# Altium PCB ModuleESP32Devkit1_CH340.PcbDoc
Units mil, origin at the board's own origin, x right, y up, seen from the top; angles counter-clockwise.
Board outline 1122.44 x 2039.37 mil, 2 copper layers (Top Layer, Bottom Layer); 31 components, 42 nets, 189 pads, 42 vias.
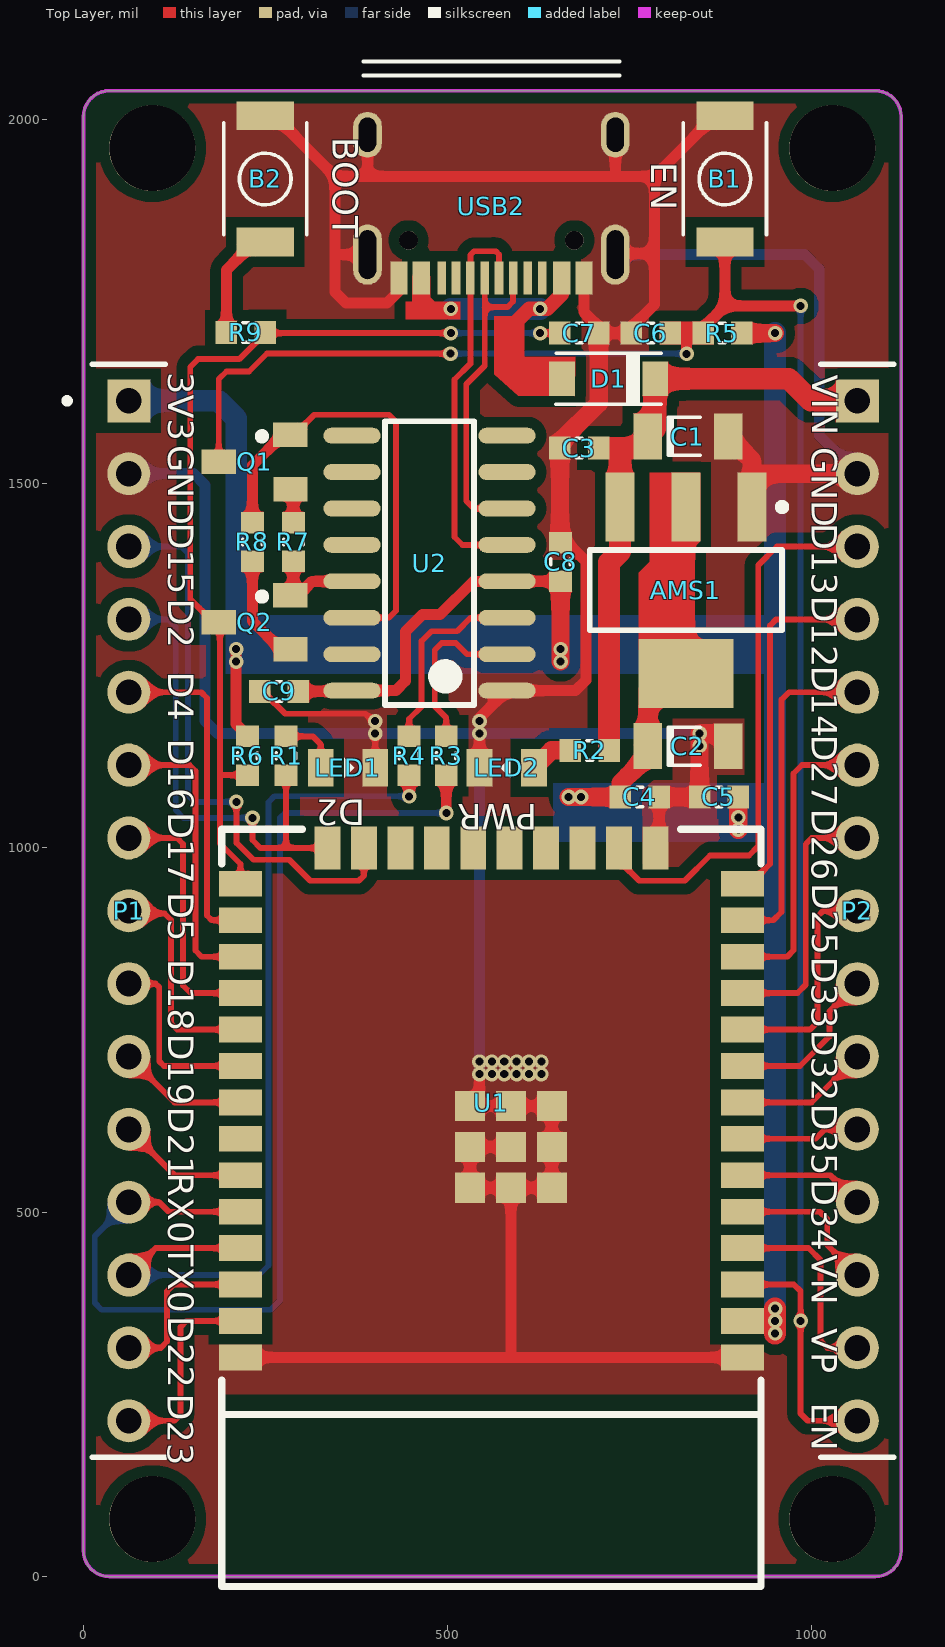
[diagram p0: Top Layer view]
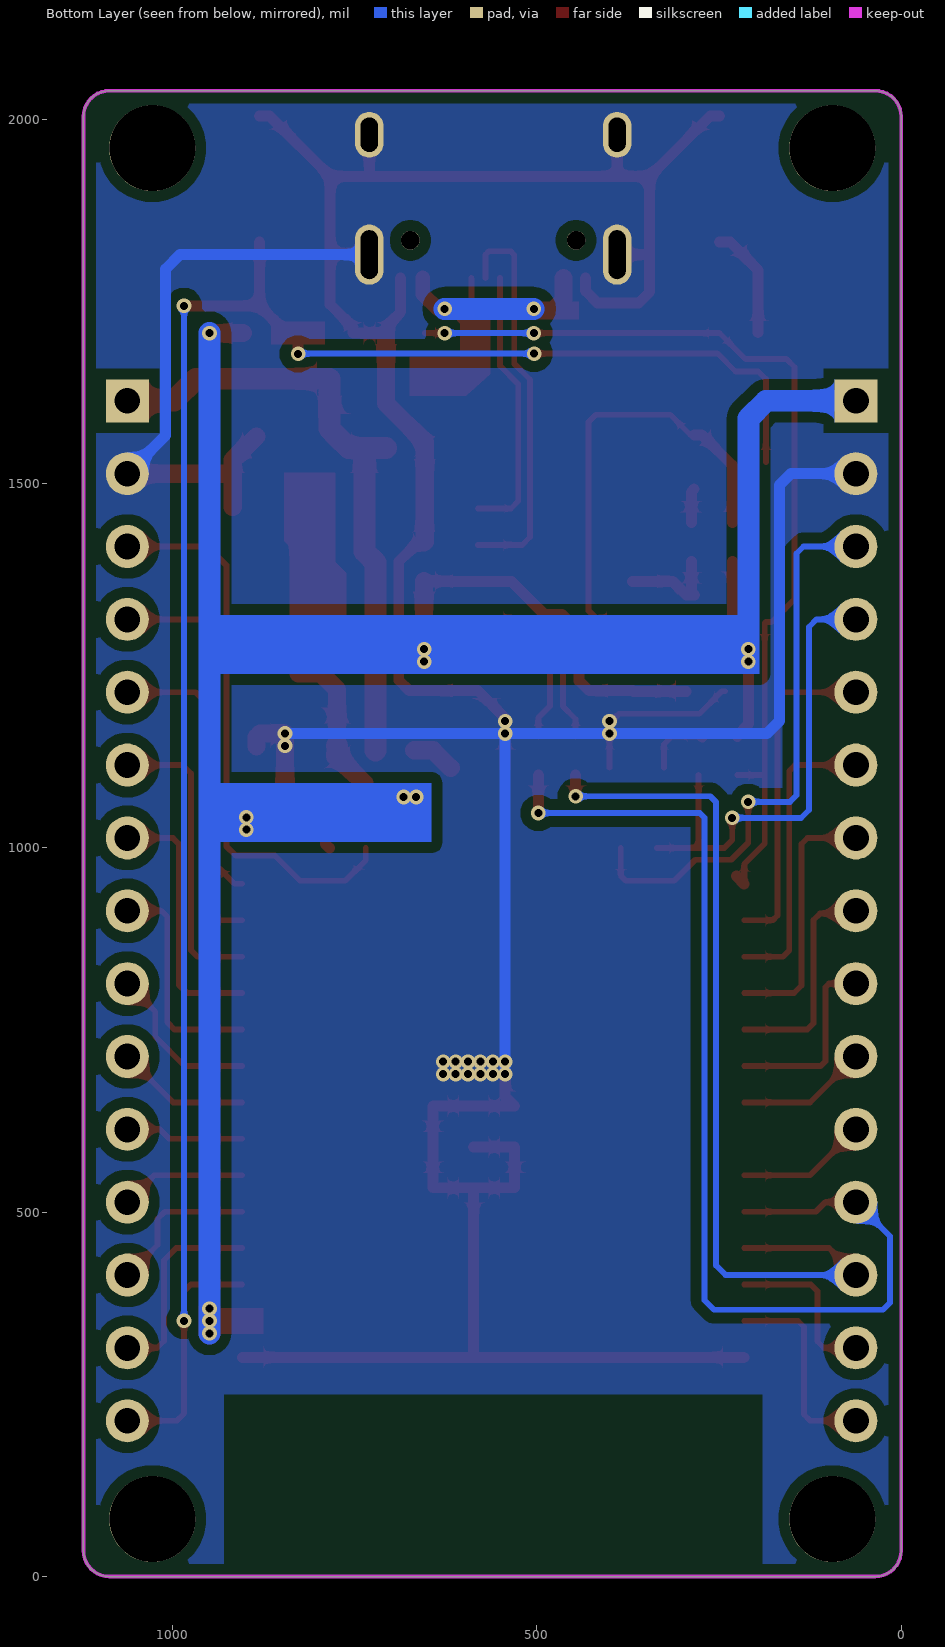
[diagram p1: Bottom Layer view, seen from below]
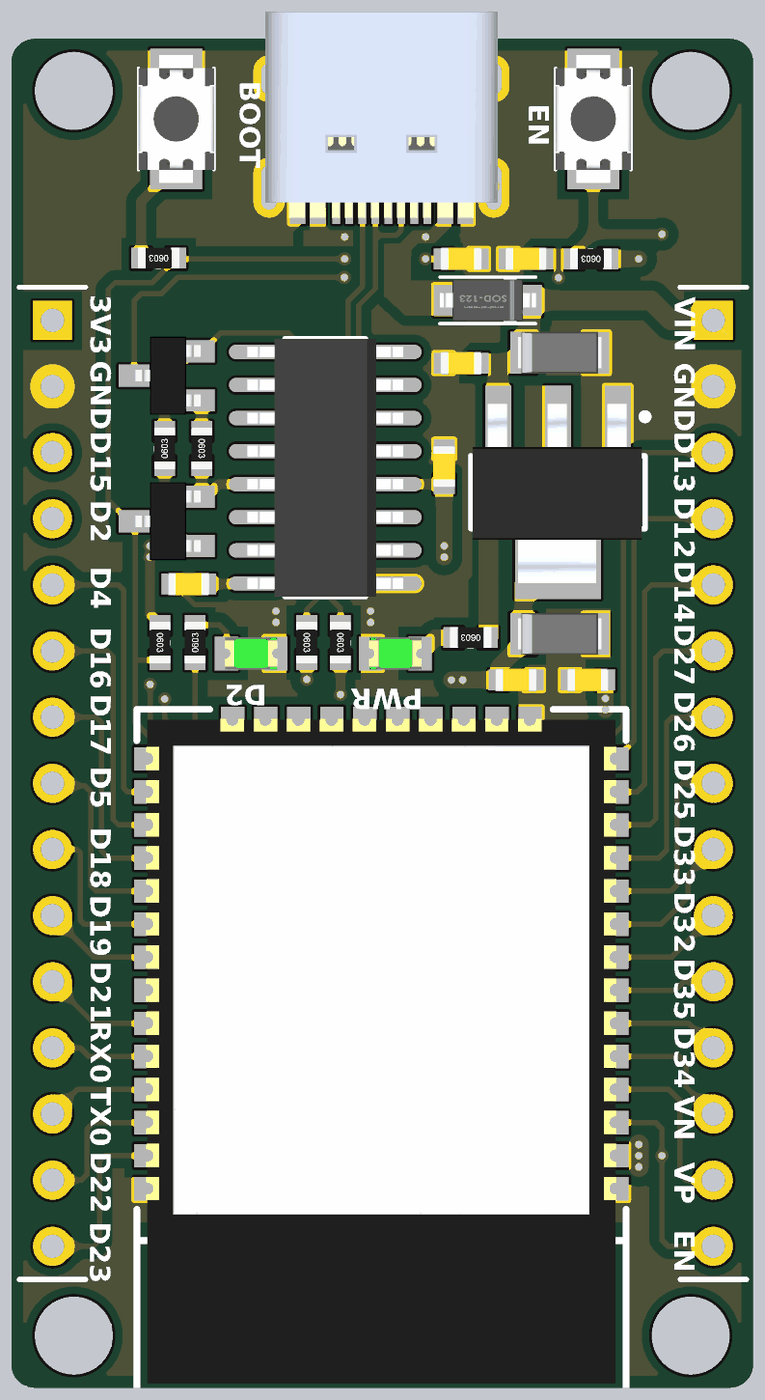
[diagram p2: 3D render of the assembled board from above, using the file's embedded part models]

## Layer stack, top to bottom
Top Solder: solder mask 0.4, Solder Resist, Dk 3.5
Top Layer: signal copper 1.4
Dielectric 1: dielectric 12.6, FR-4, Dk 4.8
Bottom Layer: signal copper 1.4
Bottom Solder: solder mask 0.4, Solder Resist, Dk 3.5

## Board outline
0,35.43 0,2003.94 cw(c35.43,2003.94) 35.43,2039.37 1087.01,2039.37 cw(c1087.01,2003.94) 1122.44,2003.94 1122.44,35.43 cw(c1087.01,35.43) 1087.01,0 35.43,0 cw(c35.43,35.43)

## Design rules (kind name [scope] priority, off if disabled: settings)
Clearance Clearance_Polygon [InPolygon] p1: gap=15 ignorepadtopadclearanceinfootprint=FALSE
Clearance [All] p2: gap=8 ignorepadtopadclearanceinfootprint=FALSE except(0: Arc-SMDPad Arc-Hole Track-SMDPad Track-Hole SMDPad-SMDPad SMDPad-Hole THPad-Text THPad-Hole Via-Hole Fill-Hole Poly-Hole Region-Hole Text-Hole)
HoleSize [All] p1: absolutevalues=TRUE maxlimit=200 minlimit=1 maxpercent=80.000 minpercent=20.000
HoleToHoleClearance [All] p1: gap=2 allowstackedmicrovias=TRUE
MinimumSolderMaskSliver [All] p1: minsoldermaskwidth=2
PlaneConnect [All] p1: planeconnectstyle=Direct reliefexpansion=20 reliefentries=4 reliefconductorwidth=10 reliefairgap=10
PolygonConnect [All] p1: connectstyle=Direct reliefconductorwidth=10 reliefentries=4 polygonreliefangle="90 Angle" airgapwidth=10
RoutingVias [All] p1: holewidth=28 width=50 viastyle="Through Hole" minholewidth=28 minwidth=50 maxholewidth=28 maxwidth=50
SilkToSilkClearance [All] p1: silktosilkclearance=2
SilkToSolderMaskClearance [IsText] p1: minsilkscreentomaskgap=2 clearancetoexposedcopper=TRUE
SolderMaskExpansion [All] p1: expansion=4 istentingtop=FALSE
Width Width_Power [InNetClass('POWER')] p1: maxlimit=30 minlimit=8 preferedwidth=15
Width [All] p2: maxlimit=25 minlimit=8 preferedwidth=15
24 further rules are at their usual default settings.

## Classes and differential pairs
net class POWER: 3.3V GND V_USB VIN

## Components (designator, comment, footprint, x,y, rotation, side; value= is the part's Value field where it differs from the comment)
AMS1 "AMS1117" SOT223-4N 827,1353.8 r270 top
B1 "Button" "BUTTON 2P 3X4X2MM" 880.54,1918.25 r90 top
B2 "Button" "BUTTON 2P 3X4X2MM" 249.47,1918.25 r90 top
C1 "4.7uF" "C_Tanta_3216 - Black" 767.05,1596.73 r270 top value=10uF/50V
C2 "10uF" "C_Tanta_3216 - Black" 767.05,1171.63 r270 top value=10uF/50V
C3 "104" CN-SMD-0603 680.59,1548.98 r0 top value=103
C4 "104" CN-SMD-0603 763.67,1070 r180 top value=103
C5 "104" CN-SMD-0603 872.33,1070 r0 top value=103
C6 "104" CN-SMD-0603 778.79,1706.7 r0 top value=103
C7 "NC" CN-SMD-0603 680.59,1706.7 r180 top value=103
C8 "104" CN-SMD-0603 655,1392.67 r270 top value=103
C9 "104" CN-SMD-0603 268.43,1215 r0 top value=103
D1 "S4" DIO-SMD-123 720.91,1644 r180 top value=1N5007
LED1 "LED SMD" LED-0805-Green 363,1110 r0 top
LED2 "LED SMD" LED-0805-Green 581,1110.01 r180 top
P1 "Header 15H" "Jump 1x15 - 2.54" 62.2,913.78 r270 top
P2 "Header 15H" "Jump 1x15 - 2.54" 1062.2,913.78 r270 top
Q1 "S8050" SOT23B 235,1530 r90 top
Q2 "S8050" SOT23B 235,1310 r90 top
R1 "1k" RES-SMD-0603 278.09,1126.59 r90 top value="R1/4W - 1K"
R2 "1k" RES-SMD-0603 695,1134 r180 top value="R1/4W - 1K"
R3 "470R" RES-SMD-0603 498,1126.59 r270 top value="R1/4W - 1K"
R4 "470R" RES-SMD-0603 447,1126.59 r270 top value="R1/4W - 1K"
R5 "4.7K" RES-SMD-0603 877,1706.7 r180 top value="R1/4W - 1K"
R6 "12K" RES-SMD-0603 225,1126.59 r270 top value="R1/4W - 1K"
R7 "10K" RES-SMD-0603 288.09,1420 r270 top value="R1/4W - 1K"
R8 "10K" RES-SMD-0603 231.81,1420 r90 top value="R1/4W - 1K"
R9 "470" RES-SMD-0603 222.89,1707.7 r180 top value="R1/4W - 1K"
U1 "ESP" "ESP32 WROOM" 914.33,1009.84 r180 top
U2 "CH340C" SO16 475,1391 r180 top
USB2 "USB type C" "USB 16P type C" 560,1733.13 r180 top

## Footprints (in the part's own frame and the unit in brackets; to place one, negate y for a bottom-side part, rotate by r counter-clockwise, add the part's x,y. Pads: shape width x height; smd on the part's side, far side on the other; paste and mask are expansions set on the pad)
"BUTTON 2P 3X4X2MM" [mm]
  rect 1x2 smd: 1(-2.2,0) 2(2.2,0)
  silkscreen extent -1.95,-1.45 1.95,1.45, body extent -2.45,-1.45 2.45,1.45, height 2
"C_Tanta_3216 - Black" [mm]
  rect 1.6x1 smd: 1(0.81,0.185) 2(0.813,2.997)
  Top Layer lines w0.127: 0.81,2.995 cw(c0.813,2.995) 0.813,2.997
  Top Layer lines w0.762: 0.81,0.185 ccw(c0.81,0.188) 0.813,0.188
  silkscreen extent 0.14,0.91 1.47,2.03, body extent 0.01,-0.01 1.61,3.19, height 1.6
CN-SMD-0603 [mm]
  round 0.254 on Mech15: 0(0,0)
  rect 0.75x0.8 smd: 1(-0.675,0) 2(0.675,0)
  silkscreen extent -0.1,-0.34 0.1,0.34, body extent -0.8,-0.43 0.8,0.43, height 0.8
DIO-SMD-123 [mm]
  rect 0.9x1.2 smd: 1(1.624,0) 2(-1.624,0)
  silkscreen extent -1.84,-0.89 1.85,0.89, body extent -1.85,-0.8 1.85,0.8, height 1.25
"ESP32 WROOM" [mm]
  rect 1.5x0.9 smd: 1(0.25,18.01) 2(0.25,16.74) 3(0.25,15.47) 4(0.25,14.2) 5(0.25,12.93) 6(0.25,11.66) 7(0.25,10.39) 8(0.25,9.12) 9(0.25,7.85) 10(0.25,6.58) 11(0.25,5.31) 12(0.25,4.04) 13(0.25,2.77) 14(0.25,1.5) 25(17.75,1.5) 26(17.75,2.77) 27(17.75,4.04) 28(17.75,5.31) 29(17.75,6.58) 30(17.75,7.85) 31(17.75,9.12) 32(17.75,10.39) 33(17.75,11.66) 34(17.75,12.93) 35(17.75,14.2) 36(17.75,15.47) 37(17.75,16.74) 38(17.75,18.01)
  rect 0.9x1.5 smd: 15(3.285,0.25) 16(4.555,0.25) 17(5.825,0.25) 18(7.095,0.25) 19(8.365,0.25) 20(9.635,0.25) 21(10.905,0.25) 22(12.175,0.25) 23(13.445,0.25) 24(14.715,0.25)
  rect 1.05x1.05 smd: 39(6.895,9.245) 39(6.895,10.67) 39(6.895,12.095) 39(8.32,9.245) 39(8.32,10.67) 39(8.32,12.095) 39(9.745,9.245) 39(9.745,10.67) 39(9.745,12.095)
  silkscreen extent -0.4,-0.4 18.4,26, body extent -0.03,-0.04 18.04,25.5, height 3
"Jump 1x15 - 2.54" [mm] "Connector; Header; 15 Position"
  rect 1.5x1.5 hole 0.9: 1(-17.78,0)
  round 1.5 hole 0.9: 2(-15.24,0) 3(-12.7,0) 4(-10.16,0) 5(-7.62,0) 6(-5.08,0) 7(-2.54,0) 8(0,0) 9(2.54,0) 10(5.08,0) 11(7.62,0) 12(10.16,0) 13(12.7,0) 14(15.24,0) 15(17.78,0)
  silkscreen extent -19.05,-1.27 19.05,1.27
LED-0805-Green [mm]
  round 0.254 on Mech15: 0(0,0)
  rect 0.9x1.3 smd: 1(-0.95,0) 2(0.95,0)
  silkscreen extent -0.13,-0.35 0.22,0.35, body extent -1.01,-0.63 1.01,0.62, height 1.1
RES-SMD-0603 [mm]
  round 0.254 on Mech15: 0(0,0)
  rect 0.75x0.8 smd: 1(-0.675,0) 2(0.675,0)
  silkscreen extent -0.1,-0.34 0.1,0.34, body extent -0.8,-0.4 0.8,0.4, height 0.43
SO16 [mm] "SOIC, 16-Leads, Body 9.90x3.91mm, Pitch 1.27mm, IPC Medium Density"
  oval 2x0.55 smd: 1(-2.7,4.445) 2(-2.7,3.175) 3(-2.7,1.905) 4(-2.7,0.635) 5(-2.7,-0.635) 6(-2.7,-1.905) 7(-2.7,-3.175) 8(-2.7,-4.445) 9(2.7,-4.445) 10(2.7,-3.175) 11(2.7,-1.905) 12(2.7,-0.635) 13(2.7,0.635) 14(2.7,1.905) 15(2.7,3.175) 16(2.7,4.445)
  silkscreen extent -1.55,-4.95 1.55,4.95, body extent -3,-4.95 3,4.95, height 1.4
SOT23B [mm] "SOT 23B"
  rect 0.85x1.2 smd: 1(0.94,-1.245) 2(0,1.25) 3(-0.95,-1.25)
  silkscreen extent 0.77,-0.38 1.02,-0.13, body extent -1.5,-1.3 1.5,1.2, height 1.06
SOT223-4N [mm] "SOT223, 4-Leads, Body 6.5x3.5mm, Pitch 2.3mm, Lead Span 7mm, IPC Medium Density"
  rect 2.4x1 smd: 1(-2.9,2.3) 2(-2.9,0) 3(-2.9,-2.3)
  rect 2.4x3.3 smd: 4(2.9,0)
  silkscreen extent -3.02,-3.35 1.4,3.48, body extent -3.39,-3.27 3.5,3.23, height 1.72
"USB 16P type C" [mm]
  oval 1x2.1 hole 0.6 slot 1.7 at 90 deg mask+0.102: 0(-4.32,-2.065) 0(4.32,-2.065)
  oval 1x1.6 hole 0.6 slot 1.2 at 90 deg mask+0.102: 0(-4.32,-6.245) 0(4.32,-6.245)
  round 0.65 hole 0.65 unplated mask+0.102: 0(-2.89,-2.565) 0(2.89,-2.565)
  rect 0.6x1.15 smd mask+0.1: A1/B12(-3.225,-1.25) A4/B9(-2.45,-1.25) B1/A12(3.225,-1.25) B4/A9(2.45,-1.25)
  rect 0.3x1.15 smd mask+0.1: A5(-1.265,-1.25) A6(-0.265,-1.25) A7(0.235,-1.25) A8(1.235,-1.25) B5(1.735,-1.25) B6(0.735,-1.25) B7(-0.765,-1.25) B8(-1.765,-1.25)
  silkscreen extent -4.47,-8.8 4.47,-8.31, body extent -4.47,-8.8 4.47,-0.9, height 0.59

## Part data
AMS1: "AMS"
B1 B2: library part "Button 2 Pin", "Button 2 pin"
C1 C2: library part CP-MKB, Description 1="10 => 220uF/6,3V/10V - 10uF => 100uF/16V", Description 2="0,1uF => 33uF/50V - 10uF => 22uF/63V", Description 3="0,47uF => 10uF/100V"
C3 C4 C5 C6 C7 C8 C9: library part CAP-MKB, "Cap SMD"
D1: library part Diode, "Default Diode", Code - JEDEC=DO-214-AB, Published=8-Jun-2000, Publisher="Altium Limited", Revision="July-2002: Re-released for DXP Platform."
LED1 LED2: library part "LED - MKB"
P1 P2: "Header, 15-Pin, Right Angle", LatestRevisionDate=17-Jul-2002, LatestRevisionNote="Re-released for DXP Platform.", Publisher="Altium Limited"
Q1: library part "Trans NPN_2", "Transistor dán"
Q2: library part "Trans NPN_1", "Transistor dán"
R1 R2 R3 R4 R5 R6 R7 R8 R9: library part "RES - MKB", "Resistor 1/4W"
U1: library part "ESP 32 WROOM", "ESP32"
U2: "High and Low Side Driver", ComponentLink1Description="Manufacturer Link", ComponentLink1URL=http://www.irf.com/, ComponentLink2Description=Datasheet, ComponentLink2URL=http://www.irf.com/product-info/datasheets/data/ir2110.pdf, DatasheetVersion=PD60147J, LatestRevisionDate=04-Mar-2005, LatestRevisionNote="Stylized 3D Model Added.", Note="Pins 4, 8 and 14 are not connected", PackageDescription="DIP; 14 Leads; Row Spacing 7.62 mm; Pitch 2.54 mm", PackageReference=PDIP14, Published=8-Jun-2000, Publisher="Altium Limited"
USB2: library part "USB C 16P", "Type C"

## Free pads (board coordinates)
  round 118.11 hole 118.11 unplated: ""(94.49,78.74) ""(94.49,1960.63) ""(1027.95,78.74) ""(1027.95,1960.63)

## Via types
v1: diameter 20, hole 11, Top Layer to Bottom Layer, tented both sides, 42 vias

## Nets (pads, with @x,y where several pads share a name; then routed paths per layer and width w, separated by ;. In a path a pad name is that pad's centre, name@x,y a point inside that pad or via, vN(x,y) a via of type N, cw(c..) or ccw(c..) an arc to the next point about the centre after c; other vN are vias at no path point)
3.3V: AMS1.2 AMS1.4 C2.1 C4.2 C5.2 C8.2 C9.2 P1.1 R5.1 R6.1 U1.2 U2.4 U2.16 | length 4342.2
  Top Layer w15: v1(209.65,1272.83) v1(209.65,1255.83) 209.65,1170.15 225,1154.8 R6.1 ; C9.2 367.7,1215 U2.16 428.78,1216 442.25,1229.46 442.25,1297.16 465.64,1320.55 489.55,1320.55 535,1366 U2.4 654.9,1366 C8.2 ; C2.1@774.35,1129.28 C2.1@774.35,1139.63
  Top Layer w25: v1(654.9,1255.83) v1(654.9,1272.83) C8.2@654.9,1366 ; v1(665.9,1070) v1(682.9,1070) C4.2 737.09,1088.85 C2.1@774.35,1126.11 ; C2.1 774.35,1217.35 796.63,1239.63 AMS1.4 AMS1.2 ; v1(898.91,1025.09) v1(898.91,1042.09) C5.2 ; R5.1 v1(949.39,1706.7) ; U1.2 v1(949.39,350.79)
  Top Layer w30: C2.1@774.35,1126.11 C2.1@774.35,1129.28 ; C2.1@774.35,1139.63 C2.1 ; v1(949.39,333.79) v1(949.39,350.79) v1(949.39,367.79)
  Bottom Layer w30: P1.1 185.34,1613.78 209.65,1589.47 v1(209.65,1272.83) v1(209.65,1255.83) v1(654.9,1255.83) v1(654.9,1272.83) ; v1@656.07,1257 948.56,1257 949.39,1256.17 ; v1(665.9,1070) v1(682.9,1070) 943.81,1070 ; v1(898.91,1025.09) 945.74,1025.09 949.39,1028.74 ; v1(949.39,333.79) v1(949.39,350.79) v1(949.39,367.79) 949.39,1028.74 ; v1(949.39,1706.7) 949.39,1256.17 ; 949.39,1028.74 949.39,1256.17
D0: C7.2 Q2.2 R6.2 R9.1 U1.25 | length 1321.9
  Top Layer w8: U1.25 215.51,978.06 187.29,1006.29 187.29,1100 ; R6.2 187.3,1100.02 ; v1(504.3,1706.7) 249.46,1706.7 213.73,1670.97 157.24,1670.97 146.57,1660.3 146.57,1341.42 177.99,1310 Q2.2 187.29,1308.5 187.29,1100 ; v1(626.8,1706.7) C7.2
  Top Layer w15: U1.25 U1.25@226,961.28
  Bottom Layer w8: v1(504.3,1706.7) v1(626.8,1706.7)
D2: P1.4 R1.1 U1.24 | length 667.9
  Top Layer w8: v1(232,1041.26) 232,1010.81 242.81,1000 278.09,1000 ; R1.1 278.09,1000 ; U1.24 278.09,1000
  Bottom Layer w8: P1.4 116.27,1313.78 126.69,1303.37 126.69,1051.96 137.39,1041.26 v1(232,1041.26)
D4: P1.5 U1.26 | length 457.8
  Top Layer w8: P1.5 161.79,1213.78 169.74,1205.82 169.74,907.26 176.21,900.79 U1.26
D5: P1.8 U1.29 | length 303.8
  Top Layer w8: P1.8 65.98,910 111.24,910 120.26,900.98 120.26,759.37 128.84,750.79 U1.29
D12: P2.4 U1.14 | length 499.8
  Top Layer w8: U1.14 915.15,950.79 942.27,977.91 942.27,1305.19 950.86,1313.78 P2.4
D13: P2.3 U1.16 | length 771.9
  Top Layer w8: U1.16 735,982.95 763.01,954.94 825.32,954.94 859.92,989.54 913.54,989.54 926.27,1002.27 926.27,1388.07 951.98,1413.78 P2.3
D14: P2.5 U1.13 | length 458.1
  Top Layer w8: U1.13 947,900.79 958.27,912.06 958.27,1203.6 968.45,1213.78 P2.5
D15: P1.3 U1.23 | length 779.1
  Top Layer w8: v1(210,1063.26) 210,1006.99 233.27,983.73 282.55,983.73 311.34,954.93 377.93,954.93 385,962 U1.23
  Bottom Layer w8: P1.3 134,1413.78 143.66,1404.12 143.66,1072.32 152.72,1063.26 v1@208,1063.26
D16: P1.6 U1.27 | length 406.6
  Top Layer w8: P1.6 145.54,1113.78 153.74,1105.58 153.74,859.16 162.12,850.79 U1.27
D17: P1.7 U1.28 | length 355.4
  Top Layer w8: P1.7 128.57,1013.78 136.74,1005.61 136.74,811.26 147.21,800.79 U1.28
D18: P1.9 U1.30 | length 259.5
  Top Layer w8: P1.9 99.02,813.78 104,808.8 104,707.33 110.55,700.79 U1.30
D19: P1.10 U1.31 | length 179.4
  Top Layer w8: P1.10 125.2,650.79 U1.31
D21: P1.11 U1.33 | length 179.4
  Top Layer w8: P1.11 125.2,550.79 U1.33
D22: P1.14 U1.36 | length 229.7
  Top Layer w8: P1.14 106.08,313.78 114.84,322.54 114.84,391.47 124.16,400.79 U1.36
D23: P1.15 U1.37 | length 280.5
  Top Layer w8: P1.15 124.78,213.78 133.4,222.4 133.4,342.6 141.59,350.79 U1.37
D25: P2.8 U1.10 | length 310.4
  Top Layer w8: U1.10 997.65,750.79 1007.5,760.64 1007.5,905.96 1015.32,913.78 P2.8
D26: P2.7 U1.11 | length 359.2
  Top Layer w8: U1.11 980,800.79 991.47,812.26 991.47,1005.55 999.7,1013.78 P2.7
D27: P2.6 U1.12 | length 408.8
  Top Layer w8: U1.12 966,850.79 974.76,859.55 974.76,1102.19 986.35,1113.78 P2.6
D32: P2.10 U1.8 | length 183.8
  Top Layer w8: U1.8 999.21,650.79 P2.10
D33: P2.9 U1.9 | length 224.7
  Top Layer w8: U1.9 951.58,700.79 983.59,700.79 1023.87,741.07 1023.87,775.45 P2.9
D34: P2.12 U1.6 | length 173
  Top Layer w8: U1.6 1025.2,550.79 P2.12
D35: P2.11 U1.7 | length 163.1
  Top Layer w8: U1.7 1004.79,600.79 1017.78,613.78 P2.11
D+: U2.5 USB2.A6 USB2.B6 | length 548.1
  Top Layer w8: USB2.A6 570.43,1814.57 566,1819 536,1819 531.06,1814.06 USB2.B6 531.06,1664.69 509.36,1642.98 509.36,1426.8 520.16,1416 U2.5
D-: U2.6 USB2.A7 USB2.B7 | length 451.2
  Top Layer w8: USB2.A7 550.75,1742.35 ; U2.6 535.7,1466 525.55,1476.15 525.55,1636.55 550.75,1661.75 550.75,1742.35 ; USB2.B7 589.64,1781.86 589.64,1750 581.98,1742.35 550.75,1742.35
DTR: Q2.1 R7.2 U2.13 | length 140.7
  Top Layer w15: R7.2 288.09,1351.09 Q2.1 294.76,1347 313.76,1366 U2.13
EN: B1.1 C6.2 P2.15 Q1.2 R5.2 U1.3 | length 2812
  Top Layer w8: Q1.2 185.79,1643.57 196.2,1653.98 227.33,1653.98 251.94,1678.59 v1(503.85,1678.59) ; U1.3 975,400.79 984.41,391.38 v1(984.41,350.79) 984.41,223.59 994.21,213.78 P2.15
  Top Layer w15: C6.2 829.61,1706.7 ; v1(827.9,1678.14) 827.9,1704.98 829.61,1706.7 ; B1.1 880.54,1743.99 ; v1(984.41,1743.99) 880.54,1743.99 ; 829.61,1706.7 R5.2 850.42,1713.88 880.54,1743.99
  Bottom Layer w8: v1(503.85,1678.59) v1@827.44,1678.59 ; v1(984.41,350.79) v1(984.41,1743.99)
GND: AMS1.1 B1.2 B2.2 C1.2 C2.2 C3.1 C4.1 C5.1 C6.1 C7.1 C8.1 C9.1 LED1.2 LED2.2 P1.2 P2.2 U1.1 U1.15 U1.38 U1.39 U2.1 USB2.0@389.92,1814.43 USB2.0@389.92,1978.99 USB2.0@730.08,1814.43 USB2.0@730.08,1978.99 USB2.A1/B12 USB2.B1/A12 | length 6604.5
  Top Layer w8: C9.1 246.14,1215 276.97,1184.16 387.18,1184.16 v1@400.4,1170.94 ; LED1.2 v1(400.4,1157.09)
  Top Layer w15: U1.38 586,300.79 ; B2.2 262.13,2004.87 345.21,1921.79 ; USB2.0@389.92,1814.43 349.39,1814.43 345.21,1810.24 ; USB2.0@390,1954.38 390,1938.08 389.92,1938 389.92,1921.79 ; USB2.B1/A12 433.03,1764.32 416.83,1748.13 360.2,1748.13 345.21,1763.12 345.21,1810.24 ; v1(543.6,689.67) 543.6,658.79 530.67,645.87 586.77,645.87 642.87,645.87 642.87,589.76 642.87,533.66 U1.39@586.77,533.66 ; LED2.2 v1(543.6,1157.09) ; v1@543.6,1178.3 U2.1 675.52,1216 689.7,1230.18 689.7,1393.3 663.75,1419.25 C8.1 ; U1.39@586.77,589.76 530.67,589.76 530.67,533.66 U1.39@586.77,533.66 ; USB2.A1/B12 686.97,1735.43 707.16,1715.23 C7.1 C6.1 752.22,1714.62 783.73,1746.13 783.73,1816 ; USB2.0@730.08,1814.43 731.65,1816 783.73,1816 ; USB2.0@730.08,1978.99 730.08,1921.87 730,1921.79 ; U1.15 790.24,1005.24 C4.1 ; B1.2 866.81,2004.87 783.73,1921.79 ; U1.1 586,300.79 ; 345.21,1810.24 345.21,1921.79 ; 345.21,1921.79 389.92,1921.79 ; 389.92,1921.79 730,1921.79 ; 586,300.79 586.77,301.56 U1.39@586.77,533.66 ; 730,1921.79 783.73,1921.79 ; 783.73,1816 783.73,1921.79
  Top Layer w25: C8.1 654.02,1420.23 C3.1 654.02,1557.02 707.16,1610.16 C7.1 ; C4.1 C5.1 v1(845.75,1157.09) 879.91,1157.09 885.05,1151.95 C2.2 ; C1.2 917.55,1532.23 AMS1.1@917.55,1513.78 ; AMS1.1 AMS1.1@917.55,1513.78 ; P2.2 AMS1.1@917.55,1513.78
  Bottom Layer w15: P1.2 151.34,1513.78 167,1498.12 167,1174.34 184.25,1157.09 v1(400.4,1157.09) v1(543.6,1157.09) ; v1(543.6,689.67) v1(543.6,1157.09) ; USB2.0@730.08,1814.43 990,1814.43 1010,1794.43 1010,1565.98 P2.2 ; v1(845.75,1157.09) v1(543.6,1157.09)
  other v1: 560.6,689.67 577.6,689.67 594.6,689.67 611.6,689.67 628.6,689.67 543.6,706.67 560.6,706.67 577.6,706.67 594.6,706.67 611.6,706.67 628.6,706.67 845.75,1140.09 400.4,1174.09 543.6,1174.09
NetB2_1: B2.1 R9.2 | length 154.6
  Top Layer w15: R9.2 196.32,1793.3 234.65,1831.64 B2.1
NetLED1_1: LED1.1 R1.2 | length 82.8
  Top Layer w8: R1.2@281.09,1153.17 314.83,1153.17 325.6,1142.4 LED1.1
  Top Layer w15: R1.2@273.1,1152.18 R1.2@274.09,1153.17
NetLED2_1: LED2.1 R2.2 | length 60
  Top Layer w25: LED2.1 642.4,1134 R2.2
NetQ1_3: Q1.3 R7.1 | length 47.6
  Top Layer w15: Q1.3 288.09,1488.73 R7.1
NetQ2_3: Q2.3 R8.1 | length 150.6
  Top Layer w15: R8.1 231.81,1311.27 270.48,1272.6 Q2.3
NetR3_1: R3.1 U2.2 | length 234.4
  Top Layer w8: R3.1 498,1178.91 482.22,1194.68 482.22,1271.64 491.9,1281.31 511.1,1281.31 526.41,1266 U2.2
NetR4_1: R4.1 U2.3 | length 268.4
  Top Layer w8: R4.1 447,1177 464,1194 464,1283.88 477.69,1297.57 512.91,1297.57 531.35,1316 U2.3
RTS: Q1.1 R8.2 U2.14 | length 632.4
  Top Layer w8: Q1.1 289.1,1567 316.76,1594.66 419.34,1594.66 429,1585 429,1325.58 419.42,1316 U2.14
  Top Layer w15: R8.2 231.81,1525.34 273.47,1567 Q1.1
RX0: P1.12 R3.2 U1.34 | length 1524.9
  Top Layer w8: P1.12 104.22,513.78 117.21,500.79 U1.34
  Top Layer w15: v1(498,1048) R3.2
  Bottom Layer w8: P1.12 15.43,467 15.43,375.72 24.89,366.26 256.95,366.26 270,379.31 270,1041.47 276.53,1048 v1(498,1048)
TX0: P1.13 R4.2 U1.35 | length 1227.3
  Top Layer w8: P1.13 99.21,450.79 U1.35
  Top Layer w15: v1(447,1070.87) R4.2
  Bottom Layer w8: P1.13 240.95,413.78 254,426.82 254,1062.84 262.04,1070.87 v1(447,1070.87)
V_USB: D1.1 USB2.A4/B9 USB2.B4/A9 | length 434.1
  Top Layer w20: 475.61,1740 v1(504.3,1740) ; USB2.A4/B9 656.46,1760.14 636.32,1740 v1(626.8,1740) 611.77,1740 593.27,1721.5 593.27,1660.36 609.63,1644 D1.1
  Top Layer w25: USB2.B4/A9 463.54,1751.46 477,1738
  Bottom Layer w30: v1(504.3,1740) v1(626.8,1740)
VIN: AMS1.3 C1.1 C3.2 D1.2 P2.1 R2.1 | length 869.8
  Top Layer w30: C3.2 732.83,1548.98 ; R2.1 721.57,1391.81 736.45,1406.69 AMS1.3 736.45,1545.36 732.83,1548.98 ; P2.1 998.22,1613.78 968,1644 D1.2 784.84,1575.32 C1.1 758.5,1548.98 732.83,1548.98
VN: P2.13 U1.5 | length 214.6
  Top Layer w8: U1.5 1010.72,500.79 1020.87,490.63 1020.87,455.11 P2.13
VP: P2.14 U1.4 | length 279.3
  Top Layer w8: U1.4 995.09,450.79 1011.88,434 1011.88,323.3 1021.41,313.78 P2.14
pads on no net: C3.0 C4.0 C5.0 C6.0 C7.0 C8.0 C9.0 LED1.0 LED2.0 R1.0 R2.0 R3.0 R4.0 R5.0 R6.0 R7.0 R8.0 R9.0 U1.17 U1.18 U1.19 U1.20 U1.21 U1.22 U1.32 U2.7 U2.8 U2.9 U2.10 U2.11 U2.12 U2.15 USB2.0@446.22,1834.11 USB2.0@673.78,1834.11 USB2.A5 USB2.A8 USB2.B5 USB2.B8

## Polygon pours and split planes (outlines as drawn)
GND on Top Layer "GND_L01_P001" (solid, remove dead copper, pour order 1): 0,35.43 0,2003.94 cw(c35.43,2003.94) 35.43,2039.37 1087.01,2039.37 cw(c1087.01,2003.94) 1122.44,2003.94 1122.44,35.43 cw(c1087.01,35.43) 1087.01,0 35.43,0 cw(c35.43,35.43)
GND on Bottom Layer "GND_L02_P002" (solid, remove dead copper, pour order 2): 0,35.43 0,2003.94 cw(c35.43,2003.94) 35.43,2039.37 1087.01,2039.37 cw(c1087.01,2003.94) 1122.44,2003.94 1122.44,35.43 cw(c1087.01,35.43) 1087.01,0 35.43,0 cw(c35.43,35.43)

## Keep-outs
Keep-Out Layer:
  lines w5: 1087.01,2039.37 cw(c1087.01,2003.94) 1122.44,2003.94 1122.44,35.43 cw(c1087.01,35.43) 1087.01,0 35.43,0 cw(c35.43,35.43) 0,35.43 0,2003.94 cw(c35.43,2003.94) 35.43,2039.37 1087.01,2039.37 ; 1087.01,2039.37 1087.01,2039.37

## Other copper
Top Layer:
  rectangle net V_USB: 442.05,1725.58 517.22,1750.26
  rectangle net EN: 790.6,1690.95 865.19,1722.45
  rectangle net 3.3V: 875,333 939,368.55
  region net 3.3V: 777,1515.22 777,1393 762.04,1378.04 762.04,1273 839.14,1273 839.14,1413.19 846.69,1420.73 846.69,1515.22
  region net V_USB: 605.04,1730.07 564.02,1729.82 563.86,1650.39 597.04,1620.41 674.64,1620.35 674.72,1674 604.98,1674
  pour cut-out: 190,0 930,0 930,250 190,250
Bottom Layer:
  rectangle net 3.3V: 194.65,1238.74 943.81,1319.74
  rectangle net 3.3V: 644.51,1008 943.81,1089
  pour cut-out: 930,0 190,0 190,250 930,250

## Silkscreen, mask and mechanical layers (free items; w line width, h text height)
Top Overlay:
  circle w7.87: c-22.44,1613.78 r3.94
  text "BOOT" at 330.69,1975.84 h60 r270
  text "EN" at 767.84,1941.1 h60 r270
  text "3V3" at 104.71,1652.67 h60 r270
  text "VIN" at 988.9,1649.43 h60 r270
  text "GND" at 104.88,1552.64 h60 r270
  text "GND" at 988.34,1549.74 h60 r270
  text "D15" at 105.02,1446.15 h60 r270
  text "D13" at 988.17,1446.05 h60 r270
  text "D12" at 988.12,1346.53 h60 r270
  text "D2" at 104.66,1341.96 h60 r270
  text "D14" at 988.23,1250.38 h60 r270
  text "D4" at 104.77,1241.6 h60 r270
  text "D27" at 988.12,1155.07 h60 r270
  text "D16" at 104.71,1149.84 h60 r270
  text "D2" at 386.51,1077.62 h60 r180
  text "PWR" at 622.59,1071.71 h60 r180
  text "D26" at 988.17,1053.57 h60 r270
  text "D17" at 104.77,1048.72 h60 r270
  text "D25" at 988.37,951.46 h60 r270
  text "D5" at 105.02,939.51 h60 r270
  text "D33" at 988.17,850.76 h60 r270
  text "D18" at 104.71,847.41 h60 r270
  text "D32" at 988.18,750.23 h60 r270
  text "D19" at 104.57,744.8 h60 r270
  text "D35" at 988.17,649.15 h60 r270
  text "D21" at 104.66,644.66 h60 r270
  text "RX0" at 104.71,554.32 h60 r270
  text "D34" at 988.17,545.57 h60 r270
  text "TX0" at 104.71,454.94 h60 r270
  text "VN" at 988.23,441.38 h60 r270
  text "D22" at 104.66,357.07 h60 r270
  text "VP" at 988.23,341.02 h60 r270
  text "D23" at 104.04,251.16 h60 r270
  text "EN" at 988.23,238.46 h60 r270
Mechanical 13:
  circle w7.87: c-22.44,1613.78 r3.94
  lines w5: 211.42,0 907.87,0
Mechanical 15:
  lines w1.97: 1122.4,0 0,0 0,2039.37 0.63,2039.37 1122.44,2039.37 1122.44,0